# EAGLE board mixer3_post layout (EAGLE 7.3.0)
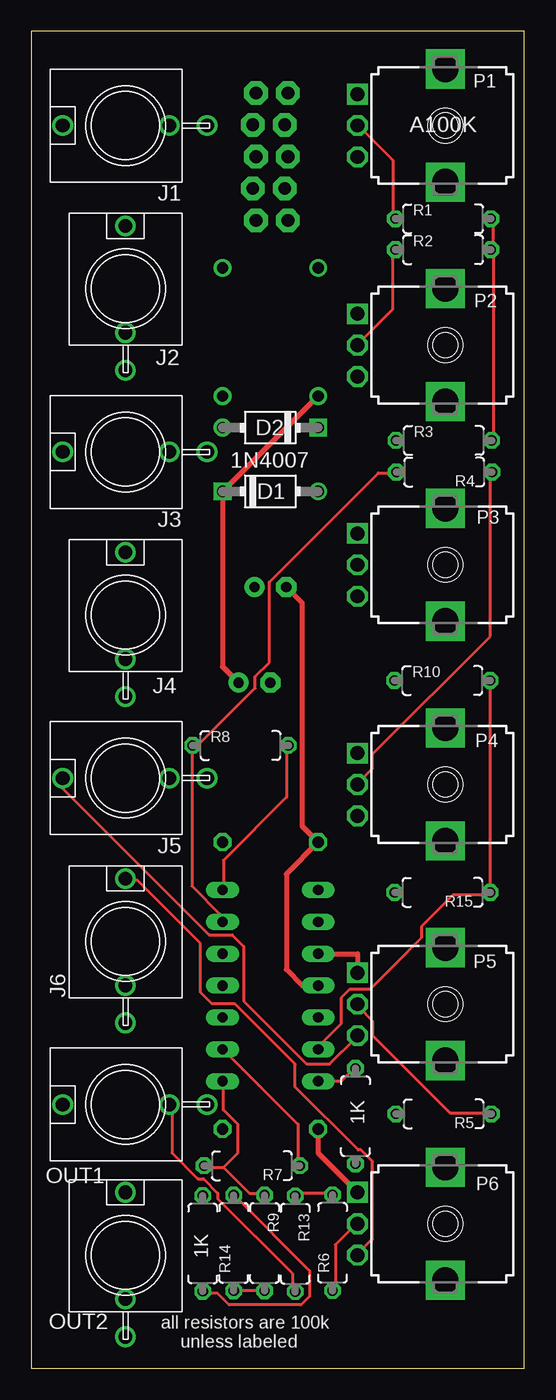
[diagram p0: board, top side]
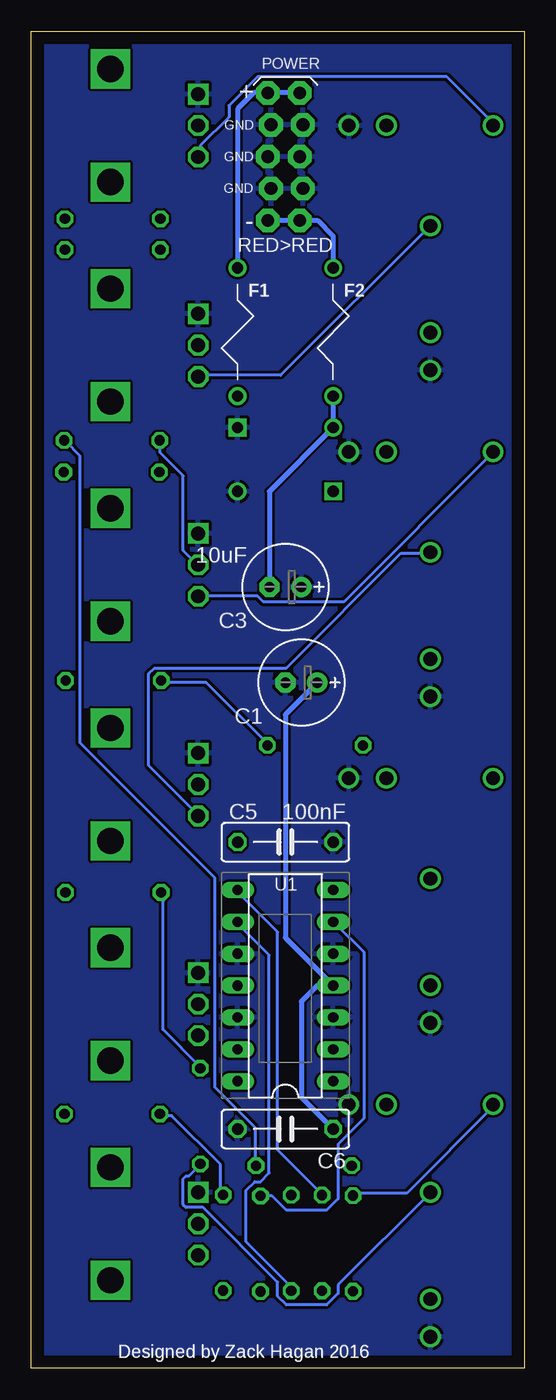
[diagram p1: board, bottom side, seen from below]

Size 39.3 x 106.5 mm. Coordinates in mm from the lower left corner, seen from the top.
Outline: 39.3,0 39.3,106.5 0,106.5 0,0 39.3,0
Copper layers (1*16): Top 0.035mm / dielectric 1.5mm / Bottom 0.035mm
Design rules "default": minimum track width 10mil, minimum drill 24mil, track to track 8mil, track to pad 8mil, pad to pad 8mil, via to via 8mil, smd to smd 8mil, copper to edge 40mil, drill to drill 8mil, minimum pad ring 10mil, minimum via ring 8mil, stop-mask expansion 4mil, vias tented up to drill 0mil, thermal gap 10mil

## Footprints (pad centres in the part's own frame; a part is rotated, then mirrored left to right if it is on the bottom)
E2,5-7 = drill 0.813 pad 1.6: + -1.27,0 | drill 0.813 pad 1.6 octagon: - 1.27,0
C075-032X103 = drill 0.914 octagon: 1 -3.81,0; 2 3.81,0
DO41-3 = drill 0.9: A 3.81,0 | drill 0.9 square: C -3.81,0
BOURNS-MF-R = drill 0.9: P$1 -5.105,0; P$2 5.105,0
WQP-PJ301M-12_JACK = drill 1.1: P$1_TIP 0,5; P$2_SWITCH 0,-3.5; P$3_SLEEVE 0,-6.5
9MM_SNAP-IN_POT = drill 1.1 square: 1 -2.5,-7 | drill 1.1 octagon: 2 0,-7; 3 2.5,-7 | drill 2.1 square: CHASSIS1 -4.5,0; CHASSIS2 4.5,0
7MM_RESISTOR = drill 0.813 octagon: 1 -3.81,0; 2 3.81,0
EURO_PWR_HEADER_LOCK = drill 1.016 pad 1.88 octagon: GND1 -2.54,1.143; GND2 -2.54,-1.397; GND3 0,1.397; GND4 0,-1.143; GND5 2.54,1.143; GND6 2.54,-1.397; NEG1 -5.08,1.397; NEG2 -5.08,-1.143; POS1 5.08,1.397; POS2 5.08,-1.143
DIL14 = drill 0.813 long: 1 -7.62,-3.81; 2 -5.08,-3.81; 3 -2.54,-3.81; 4 0,-3.81; 5 2.54,-3.81; 6 5.08,-3.81; 7 7.62,-3.81; 8 7.62,3.81; 9 5.08,3.81; 10 2.54,3.81; 11 0,3.81; 12 -2.54,3.81; 13 -5.08,3.81; 14 -7.62,3.81

## Placement (x,y rotation side)
C1  10uF  [E2,5-7]  17.78,54.61 180 bottom
C3  10uF  [E2,5-7]  19.05,62.23 180 bottom
C5  100nF  [C075-032X103]  19.05,41.91 180 bottom
C6  100nF  [C075-032X103]  19.05,19.05 180 bottom
D1  1N4007  [DO41-3]  19.05,69.85 0 top
D2  1N4007  [DO41-3]  19.05,74.93 180 top
F1  MF-R500+  [BOURNS-MF-R]  22.86,82.55 270 bottom
F2  MF-R500+  [BOURNS-MF-R]  15.24,82.55 270 bottom
J1  THONKICONNNEW  [WQP-PJ301M-12_JACK]  7.5,99 90 top
J2  THONKICONNNEW  [WQP-PJ301M-12_JACK]  7.5,86 0 top
J3  THONKICONNNEW  [WQP-PJ301M-12_JACK]  7.5,73 90 top
J4  THONKICONNNEW  [WQP-PJ301M-12_JACK]  7.5,60 0 top
J5  THONKICONNNEW  [WQP-PJ301M-12_JACK]  7.5,47 90 top
J6  THONKICONNNEW  [WQP-PJ301M-12_JACK]  7.5,34 0 top
OUT1  THONKICONNNEW  [WQP-PJ301M-12_JACK]  7.5,21 90 top
OUT2  THONKICONNNEW  [WQP-PJ301M-12_JACK]  7.5,9 0 top
P1  A100K  [9MM_SNAP-IN_POT]  33,99 270 top
P2  A100K  [9MM_SNAP-IN_POT]  33,81.5 270 top
P3  A100K  [9MM_SNAP-IN_POT]  33,64 270 top
P4  A100K  [9MM_SNAP-IN_POT]  33,46.5 270 top
P5  A100K  [9MM_SNAP-IN_POT]  33,29 270 top
P6  A100K  [9MM_SNAP-IN_POT]  33,11.5 270 top
R1  100K  [7MM_RESISTOR]  32.82,91.57 0 top
R2  100K  [7MM_RESISTOR]  32.82,89.11 0 top
R3  100K  [7MM_RESISTOR]  32.88,73.91 0 top
R4  100K  [7MM_RESISTOR]  32.91,71.39 180 top
R5  100K  [7MM_RESISTOR]  32.86,20.25 180 top
R6  100K  [7MM_RESISTOR]  24.01,9.99 90 top
R7  100K  [7MM_RESISTOR]  17.58,16.12 180 top
R8  100K  [7MM_RESISTOR]  16.67,49.61 0 top
R9  100K  [7MM_RESISTOR]  18.59,9.97 270 top
R10  100K  [7MM_RESISTOR]  32.76,54.78 0 top
R11  1K  [7MM_RESISTOR]  13.66,9.93 90 top
R12  1K  [7MM_RESISTOR]  25.83,20.08 270 top
R13  100K  [7MM_RESISTOR]  21.03,9.91 270 top
R14  100K  [7MM_RESISTOR]  16.13,9.97 90 top
R15  100K  [7MM_RESISTOR]  32.77,37.9 180 top
SV1  EURO_POWER_HEADERLOCK_PADS  [EURO_PWR_HEADER_LOCK]  19.05,96.52 90 bottom
U1  TL074_  [DIL14]  19.05,30.48 90 bottom

## Library data of the parts
C1 C3 C5 C6 = resistor
D1 D2 = gm-diodes
F1 F2 = ptc-littlefuse
J1-J6 OUT1 OUT2 P1-P6 R1-R15 SV1 U1 = MusicThingModular

## Nets
+12V: C1.+ C6.1 D1.C F1.P$2 U1.4
-12V: C3.- C5.2 D2.A F2.P$2 U1.11
GND: C1.- C3.+ C5.1 C6.2 D1.A D2.C J1.P$3_SLEEVE J2.P$3_SLEEVE J3.P$3_SLEEVE J4.P$3_SLEEVE J5.P$3_SLEEVE J6.P$3_SLEEVE OUT1.P$3_SLEEVE OUT2.P$3_SLEEVE P1.1 P2.1 P3.1 P4.1 P5.1 P6.1 SV1.GND1 SV1.GND2 SV1.GND3 SV1.GND4 SV1.GND5 SV1.GND6 U1.3 U1.5 U1.10 U1.12
N$1: J2.P$1_TIP P2.3
N$2: P2.2 R2.1
N$3: J1.P$1_TIP P1.3
N$4: P1.2 R1.1
N$5: J3.P$1_TIP P3.3
N$6: P3.2 R3.1
N$7: J4.P$1_TIP P4.3
N$8: P4.2 R4.1
N$9: J5.P$1_TIP P5.3
N$10: P5.2 R5.1
N$11: J6.P$1_TIP P6.3
N$12: P6.2 R6.1
N$13: R1.2 R2.2 R3.2 R7.1 U1.2
N$15: R8.2 R10.1 U1.7
N$17: R9.2 R14.1 U1.9
N$18: OUT1.P$1_TIP R11.2
N$22: R12.1 R15.2 U1.14
N$23: R10.2 R15.1 U1.13
N$24: R4.2 R5.2 R6.2 R8.1 R13.1 U1.6
N$25: R11.1 R14.2 U1.8
N$26: OUT1.P$2_SWITCH R13.2
N$27: OUT2.P$1_TIP R12.2
N$28: R7.2 R9.1 U1.1
N$31: F2.P$1 SV1.NEG1 SV1.NEG2
N$32: F1.P$1 SV1.POS1 SV1.POS2

## Tracks (layer width: path | path; a pad name or v marks a point on that pad's centre or on a via)
+12V
  Top 0.406: F1.P$2 22.84,77.44 D1.C 15.24,55.88 C1.+
  Bottom 0.406: C1.+ 19.05,52.07 19.05,34.29 U1.4 16.51,30.48 17.78,29.21 17.78,21.59 C6.1
-12V
  Top 0.406: C3.- 21.59,60.96 21.59,43.18 C5.2 20.32,39.37 20.32,31.75 21.59,30.48 U1.11
  Bottom 0.406: F2.P$2 D2.A 20.32,69.85 C3.-
GND
  Top 0.406: U1.10 26,33.02 P5.1 | C6.2 22.86,17.14 P6.1
  pour Bottom (isolate 0.12): 1.27,106.68 0,106.68 0,0 39.37,0 39.37,106.68
N$1
  Bottom 0.254: P2.3 25.83,79.1 19.43,79.1 7.54,90.98 J2.P$1_TIP
N$2
  Top 0.254: R2.1 28.8,88.92 28.8,84.35 26.06,81.61 P2.2
N$3
  Bottom 0.254: P1.3 25.83,96.7 25.83,97.38 23.55,99.67 23.55,100.58 21.26,102.87 6.17,102.87 2.52,99.21 J1.P$1_TIP
N$4
  Top 0.254: R1.1 28.8,91.67 28.8,96.24 26.06,98.98 P1.2
N$5
  Bottom 0.254: P3.3 25.83,61.49 21.26,61.49 20.8,61.04 14.4,61.04 2.52,72.92 J3.P$1_TIP
N$6
  Bottom 0.254: R3.1 29.03,73.84 29.03,72.92 27.2,71.09 27.2,65.15 26.06,64.01 P3.2
N$7
  Bottom 0.254: J4.P$1_TIP 7.54,64.92 9.83,64.92 18.97,55.78 29.49,55.78 29.95,55.32 29.95,48.01 26.06,44.12 P4.3
N$8
  Top 0.254: R4.1 36.58,71.32 36.58,58.29 27.2,48.92 27.2,47.78 26.06,46.63 P4.2
N$9
  Top 0.254: P5.3 25.83,26.29 23.77,24.23 21.95,24.23 16.92,29.26 16.92,33.6 16,34.52 14.17,34.52 2.52,46.18 2.52,46.86 J5.P$1_TIP
N$10
  Top 0.254: R5.1 36.58,20.34 33.38,20.34 27.2,26.52 27.2,27.66 26.06,28.8 P5.2
N$11
  Top 0.254: J6.P$1_TIP 7.54,38.86 8.46,38.86 13.49,33.83 13.49,29.95 14.4,29.03 16.23,29.03 21.03,24.23 21.03,22.4 26.06,17.37 26.29,17.37 27.2,16.46 27.2,10.29 26.06,9.14 P6.3
N$12
  Top 0.254: R6.1 24.23,6.4 24.23,9.83 25.83,11.43 P6.2
N$13
  Top 0.254: 15.09,25.38 U1.2 15.32,25.38 21.26,19.43 21.26,16.23 R7.1 | R3.2 36.8,74.07 36.8,88.92 R2.2 36.8,89.15 36.8,91.44 R1.2
  Bottom 0.254: R7.1 21.49,16.23 21.49,19.2 24.69,22.4 24.69,39.09 35.43,49.84 35.43,72.69 36.58,73.84 R3.2
N$15
  Top 0.254: U1.7 15.32,38.18 15.32,40.46 20.34,45.49 20.34,49.61 R8.2
  Bottom 0.254: R10.1 28.8,54.63 25.38,54.63 20.57,49.84 R8.2
N$17
  Top 0.254: R14.1 16.23,6.17 18.52,6.17 R9.2
  Bottom 0.254: U1.9 22.86,35.43 20.34,32.92 20.34,15.54 21.03,14.86 21.49,14.86 22.17,14.17 22.17,10.06 18.75,6.63 18.75,6.17 R9.2
N$18
  Bottom 0.254: R11.2 13.49,13.95 9.37,13.95 2.52,20.8 OUT1.P$1_TIP
N$22
  Top 0.254: U1.14 24.69,22.86 25.6,23.77 R12.1
  Bottom 0.254: R15.2 28.8,37.72 28.8,26.98 25.83,24 R12.1
N$23
  Top 0.254: U1.13 22.86,25.6 24.69,27.43 24.69,29.49 25.38,30.18 26.98,30.18 31.09,34.29 31.09,35.2 33.6,37.72 36.58,37.72 R15.1 36.58,37.95 36.58,54.63 R10.2
N$24
  Top 0.254: U1.6 15.09,35.66 15.09,36.12 12.8,38.41 12.8,49.61 R8.1 13.03,49.84 13.49,49.84 17.83,54.18 17.83,55.09 18.97,56.24 18.97,62.64 27.66,71.32 29.03,71.32 R4.2 | R13.1 21.03,13.95 24,13.95 R6.2
  Bottom 0.254: R5.2 29.03,20.12 28.12,20.12 24.23,16.23 24.23,13.95 R6.2 | R13.1 20.8,13.72 20.12,13.72 18.97,12.57 15.77,12.57 14.86,13.49 14.86,17.83 12.8,19.89 12.8,33.15 15.09,35.43 U1.6
N$25
  Top 0.254: R11.1 13.72,5.94 14.86,5.94 15.77,5.03 21.49,5.03 22.17,5.71 22.17,7.77 16.23,13.72 R14.2
  Bottom 0.254: U1.8 22.86,37.95 19.66,34.75 19.66,17.37 16.23,13.95 R14.2
N$26
  Top 0.254: R13.2 20.8,6.17 20.8,7.54 14.86,13.49 14.86,13.95 13.72,15.09 13.26,15.09 11.2,17.14 11.2,20.8 OUT1.P$2_SWITCH
N$27
  Bottom 0.254: R12.2 25.83,16.23 26.75,15.32 26.98,15.32 27.2,15.09 27.2,13.03 26.98,12.8 25.6,12.8 19.66,6.86 19.66,5.71 18.97,5.03 15.77,5.03 14.86,5.94 14.86,6.63 7.54,13.95 OUT2.P$1_TIP
N$28
  Top 0.254: 15.32,16 17.37,13.95 18.52,13.95 R9.1 | 15.32,16 13.95,16 R7.2 | 15.32,16 16.46,17.14 16.46,19.43 15.32,20.57 15.32,22.86 U1.1
N$31
  Bottom 0.406: SV1.NEG1 SV1.NEG2 16.51,91.44 15.24,90.17 F2.P$1
N$32
  Bottom 0.406: SV1.POS2 SV1.POS1 21.59,101.6 22.86,100.33 F1.P$1

## Text on the board
tPlace: all resistors are 100k / unless labeled
bPlace: Designed by Zack Hagan 2016 | Designed by Zack Hagan 2016